# Altium PCB LED_POV.PcbDoc
Units mil, origin at the board's own origin, x right, y up, seen from the top; angles counter-clockwise.
Board outline 3937.01 x 3937.01 mil, 2 copper layers (Top Layer, Bottom Layer); 27 components, 0 nets, 93 pads, 0 vias.
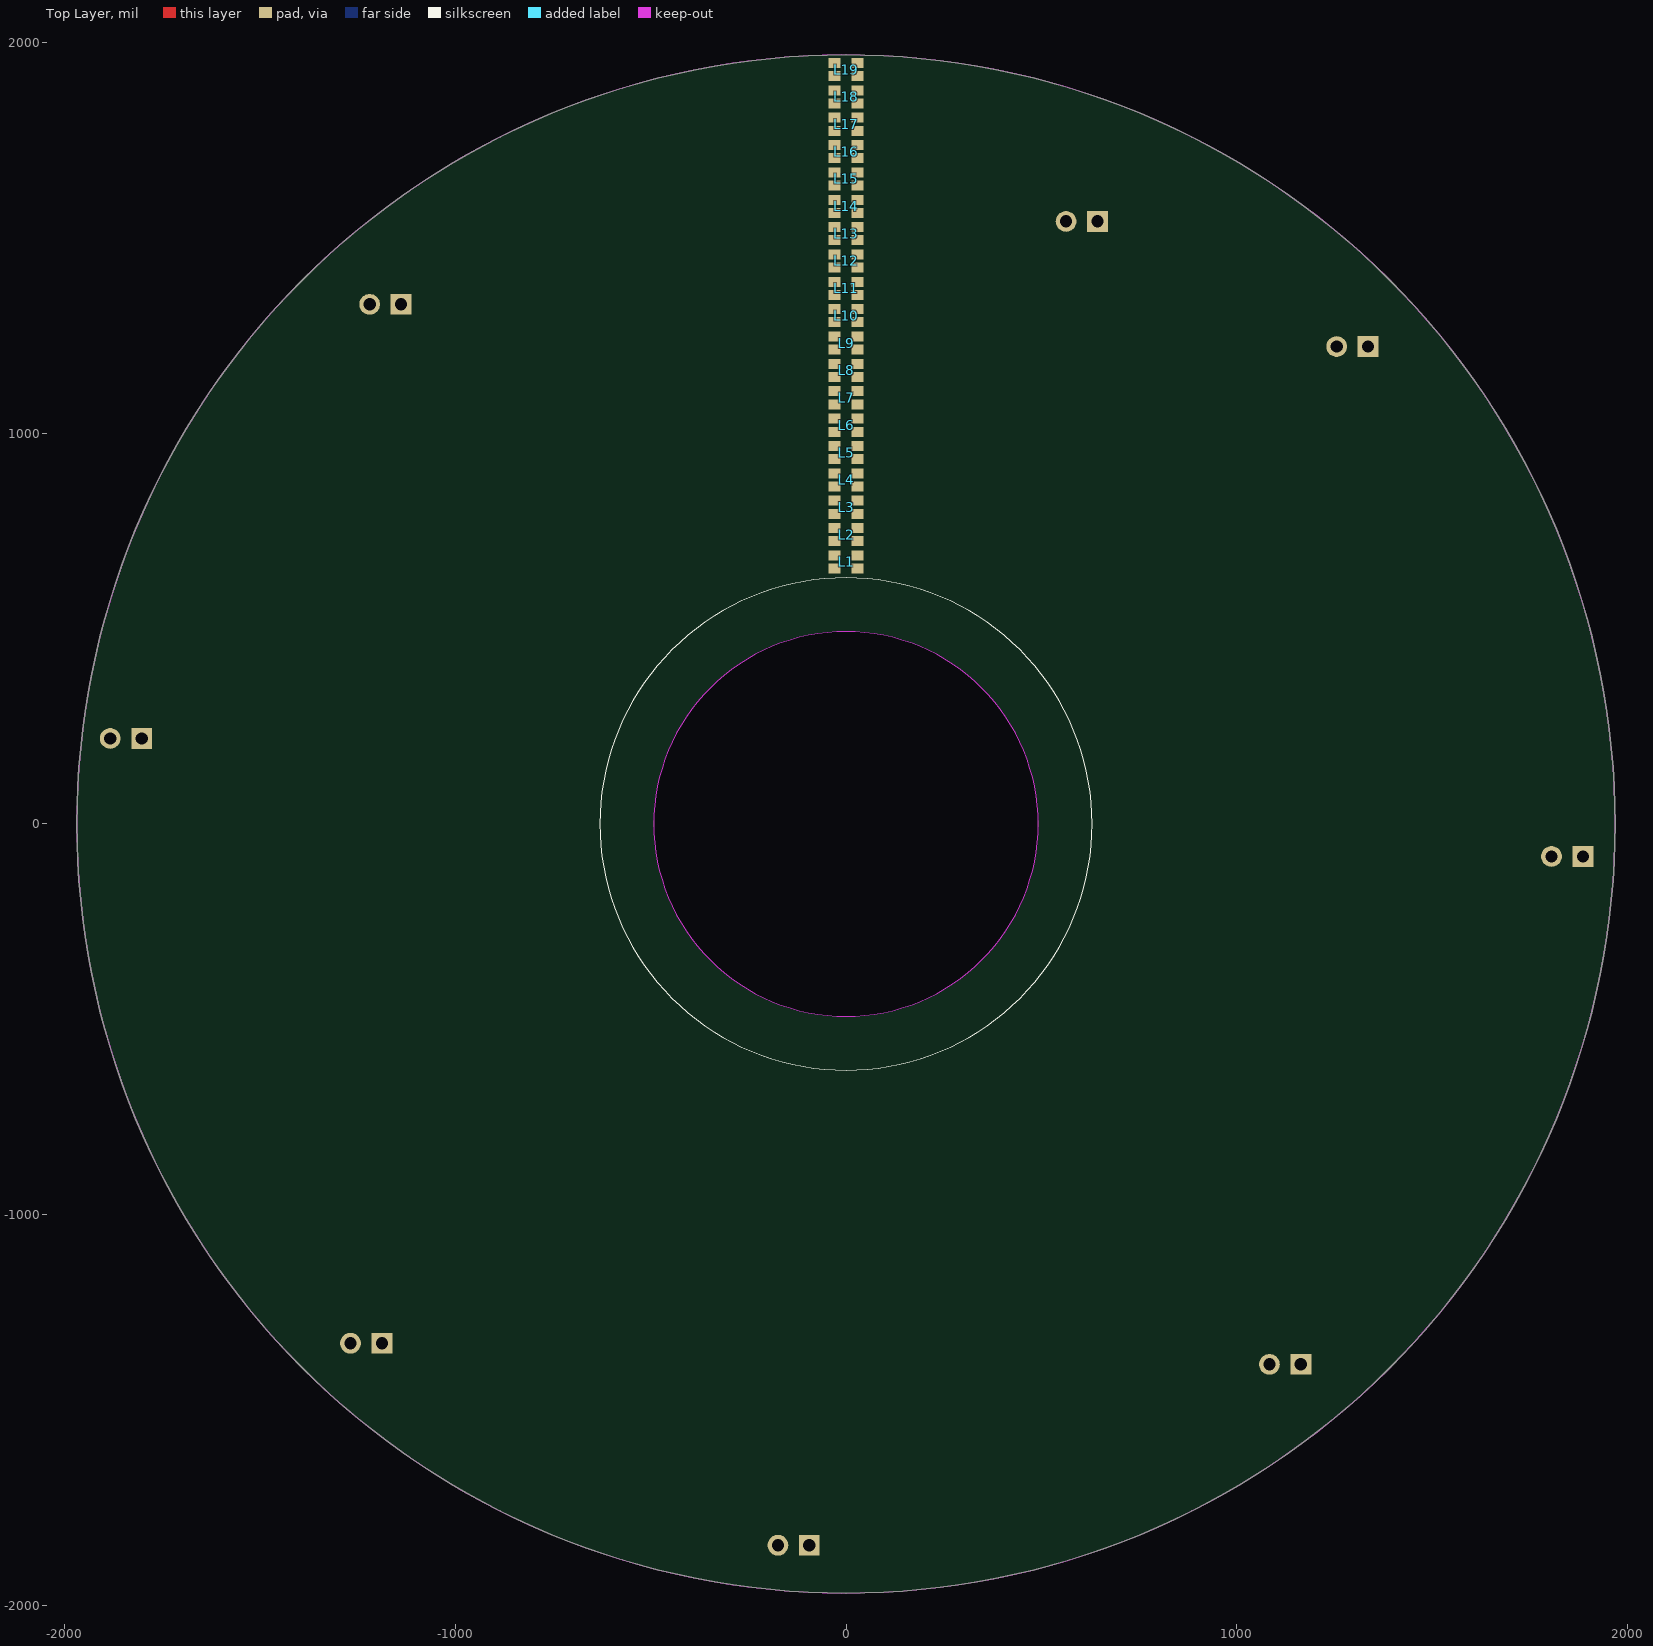
[diagram p0: Top Layer view]
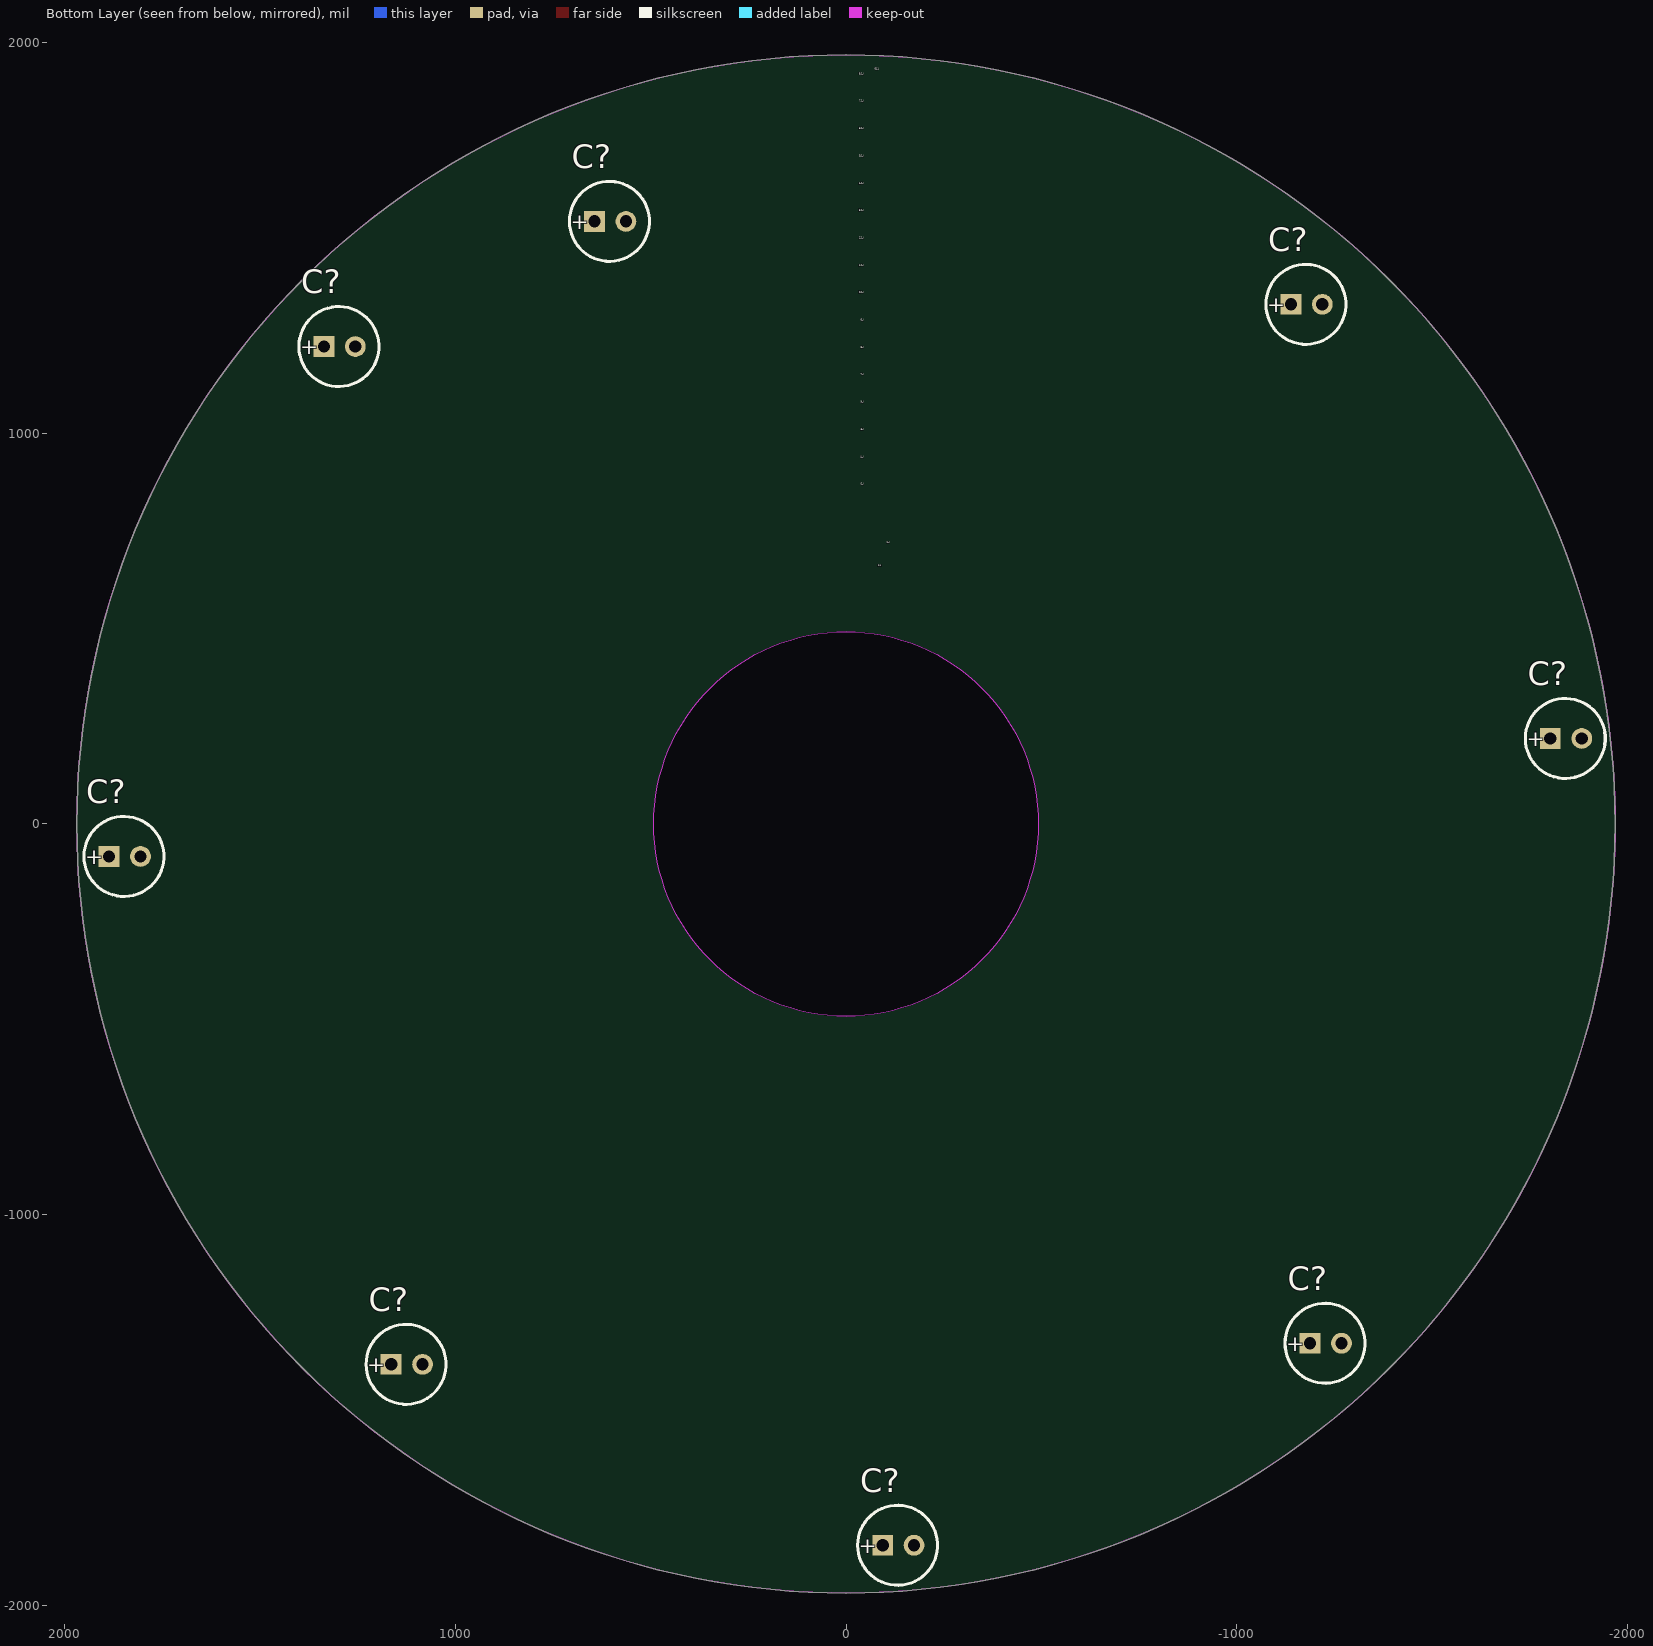
[diagram p1: Bottom Layer view, seen from below]

## Layer stack, top to bottom
Top Layer: signal copper 1.4
Dielectric: dielectric 12.6, FR-4, Dk 4.8
Bottom Layer: signal copper 1.4

## Board outline
-1968.5,0 ccw(c0,0) 0,-1968.5 ccw(c0,0) 1968.5,0 ccw(c0,0) 0,1968.5 ccw(c0,0)

## Design rules (kind name [scope] priority, off if disabled: settings)
Clearance [All] p1: gap=10
ComponentClearance ComponentClearance_to_RGB [(ObjectKind = 'Component') And (Footprint = 'LED_0605_RGB') vs (ObjectKind = 'Component') And (Footprint = 'LED_0605_RGB')] p1: gap=7 collisioncheckmode=3 verticalgap=10 showdistances=FALSE
ComponentClearance [All] p2: gap=10 collisioncheckmode=3 verticalgap=10 showdistances=FALSE
PolygonConnect [All] p1: connectstyle=Relief reliefconductorwidth=10 reliefentries=4 polygonreliefangle="90 Angle"
RoutingVias [All] p1: holewidth=28 width=50 viastyle="Through Hole" minholewidth=28 minwidth=50 maxholewidth=28 maxwidth=50
SilkToSilkClearance [All] p1: silktosilkclearance=0
SilkscreenOverComponentPads [All] p1: minsilkscreentomaskgap=0
SolderMaskExpansion [All] p1: expansion=4
Width [All] p1: maxlimit=10 minlimit=10 preferedwidth=10
25 further rules are at their usual default settings.

## Classes and differential pairs
component class LED_POV: L1 L2 L3 L4 L5 L6 L7 L8 L9 L10 L11 L12 L13 L14 L15 L16 L17 L18 L19

## Components (designator, comment, footprint, x,y, rotation, side; value= is the part's Value field where it differs from the comment)
C? "1uF" cap_5x11 -134,-1846 r180 bottom
C? "1uF" cap_5x11 1846,-83 r180 bottom
C? "1uF" cap_5x11 -1228,-1329 r180 bottom
C? "1uF" cap_5x11 1296,1222 r180 bottom
C? "1uF" cap_5x11 1124,-1383 r180 bottom
C? "1uF" cap_5x11 -1843,219 r180 bottom
C? "1uF" cap_5x11 -1179,1330 r180 bottom
C? "1uF" cap_5x11 603.54,1542.38 r180 bottom
L1 "LED_RGB" LED_0605_RGB 0,670.61 r0 top
L2 "LED_RGB" LED_0605_RGB 0,740.61 r0 top
L3 "LED_RGB" LED_0605_RGB 0,810.61 r0 top
L4 "LED_RGB" LED_0605_RGB 0,880.61 r0 top
L5 "LED_RGB" LED_0605_RGB 0,950.61 r0 top
L6 "LED_RGB" LED_0605_RGB 0,1020.61 r0 top
L7 "LED_RGB" LED_0605_RGB 0,1091 r0 top
L8 "LED_RGB" LED_0605_RGB 0,1161 r0 top
L9 "LED_RGB" LED_0605_RGB 0,1231 r0 top
L10 "LED_RGB" LED_0605_RGB 0,1301.06 r0 top
L11 "LED_RGB" LED_0605_RGB 0,1371 r0 top
L12 "LED_RGB" LED_0605_RGB 0,1441 r0 top
L13 "LED_RGB" LED_0605_RGB 0,1511 r0 top
L14 "LED_RGB" LED_0605_RGB 0,1581 r0 top
L15 "LED_RGB" LED_0605_RGB 0,1651 r0 top
L16 "LED_RGB" LED_0605_RGB 0,1721 r0 top
L17 "LED_RGB" LED_0605_RGB 0,1791 r0 top
L18 "LED_RGB" LED_0605_RGB 0,1861 r0 top
L19 "LED_RGB" LED_0605_RGB 0,1931.06 r0 top

## Footprints (in the part's own frame and the unit in brackets; to place one, negate y for a bottom-side part, rotate by r counter-clockwise, add the part's x,y. Pads: shape width x height; smd on the part's side, far side on the other; paste and mask are expansions set on the pad)
cap_5x11 [mm] "RM2.5 dia: 6mm height: any"
  round 1.35 hole 0.8: N(1.021,0)
  rect 1.35x1.35 hole 0.8: P(-1.021,0)
  silkscreen extent -2.65,-2.6 2.55,2.6, body extent -2.53,-2.53 2.53,2.53, height 11.53
LED_0605_RGB [mm]
  rect 0.8x0.65 smd: A(-0.75,-0.425) K1(-0.75,0.425) K2(0.75,0.425) K3(0.75,-0.425)
  body extent -0.75,-0.8 0.75,0.8, height 0.38

## Part data
C? C? C? C? C? C? C? C?: library part CAP_ELECT, "Polarized Capacitor"
L1 L2 L3 L4 L5 L6 L7 L8 L9 L10 L11 L12 L13 L14 L15 L16 L17 L18 L19: "LED_RGB_COMMON_ANODE"

## Free pads (board coordinates)
  round 984.25 hole 984.25: 0(0,0)

## Nets (pads, with @x,y where several pads share a name; then routed paths per layer and width w, separated by ;. In a path a pad name is that pad's centre, name@x,y a point inside that pad or via, vN(x,y) a via of type N, cw(c..) or ccw(c..) an arc to the next point about the centre after c; other vN are vias at no path point)
pads on no net: C?.N C?.P L1.A L1.K1 L1.K2 L1.K3 L2.A L2.K1 L2.K2 L2.K3 L3.A L3.K1 L3.K2 L3.K3 L4.A L4.K1 L4.K2 L4.K3 L5.A L5.K1 L5.K2 L5.K3 L6.A L6.K1 L6.K2 L6.K3 L7.A L7.K1 L7.K2 L7.K3 L8.A L8.K1 L8.K2 L8.K3 L9.A L9.K1 L9.K2 L9.K3 L10.A L10.K1 L10.K2 L10.K3 L11.A L11.K1 L11.K2 L11.K3 L12.A L12.K1 L12.K2 L12.K3 L13.A L13.K1 L13.K2 L13.K3 L14.A L14.K1 L14.K2 L14.K3 L15.A L15.K1 L15.K2 L15.K3 L16.A L16.K1 L16.K2 L16.K3 L17.A L17.K1 L17.K2 L17.K3 L18.A L18.K1 L18.K2 L18.K3 L19.A L19.K1 L19.K2 L19.K3

## Keep-outs
Keep-Out Layer:
  circle w0.21: c0,0 r1968.5
  circle w0.21: c0,0 r492.13

## Silkscreen, mask and mechanical layers (free items; w line width, h text height)
Top Overlay:
  circle w0.21: c0,0 r629.92

## Text inside footprints (layer, text, board x,y; h text height)
C?: Bottom Overlay "+" at -33,-1866 h40.05
C?: Bottom Overlay "+" at 704.54,1522.38 h40.05
C?: Bottom Overlay "+" at -1078,1310 h40.05
C?: Bottom Overlay "+" at -1742,199 h40.05
C?: Bottom Overlay "+" at 1225,-1403 h40.05
C?: Bottom Overlay "+" at 1397,1202 h40.05
C?: Bottom Overlay "+" at -1127,-1349 h40.05
C?: Bottom Overlay "+" at 1947,-103 h40.05